# Altium PCB PCB.PcbDoc
Units mil, origin at the board's own origin, x right, y up, seen from the top; angles counter-clockwise.
Board outline 3360 x 1950.13 mil, 2 copper layers (Top Layer, Bottom Layer); 70 components, 39 nets, 187 pads, 106 vias.
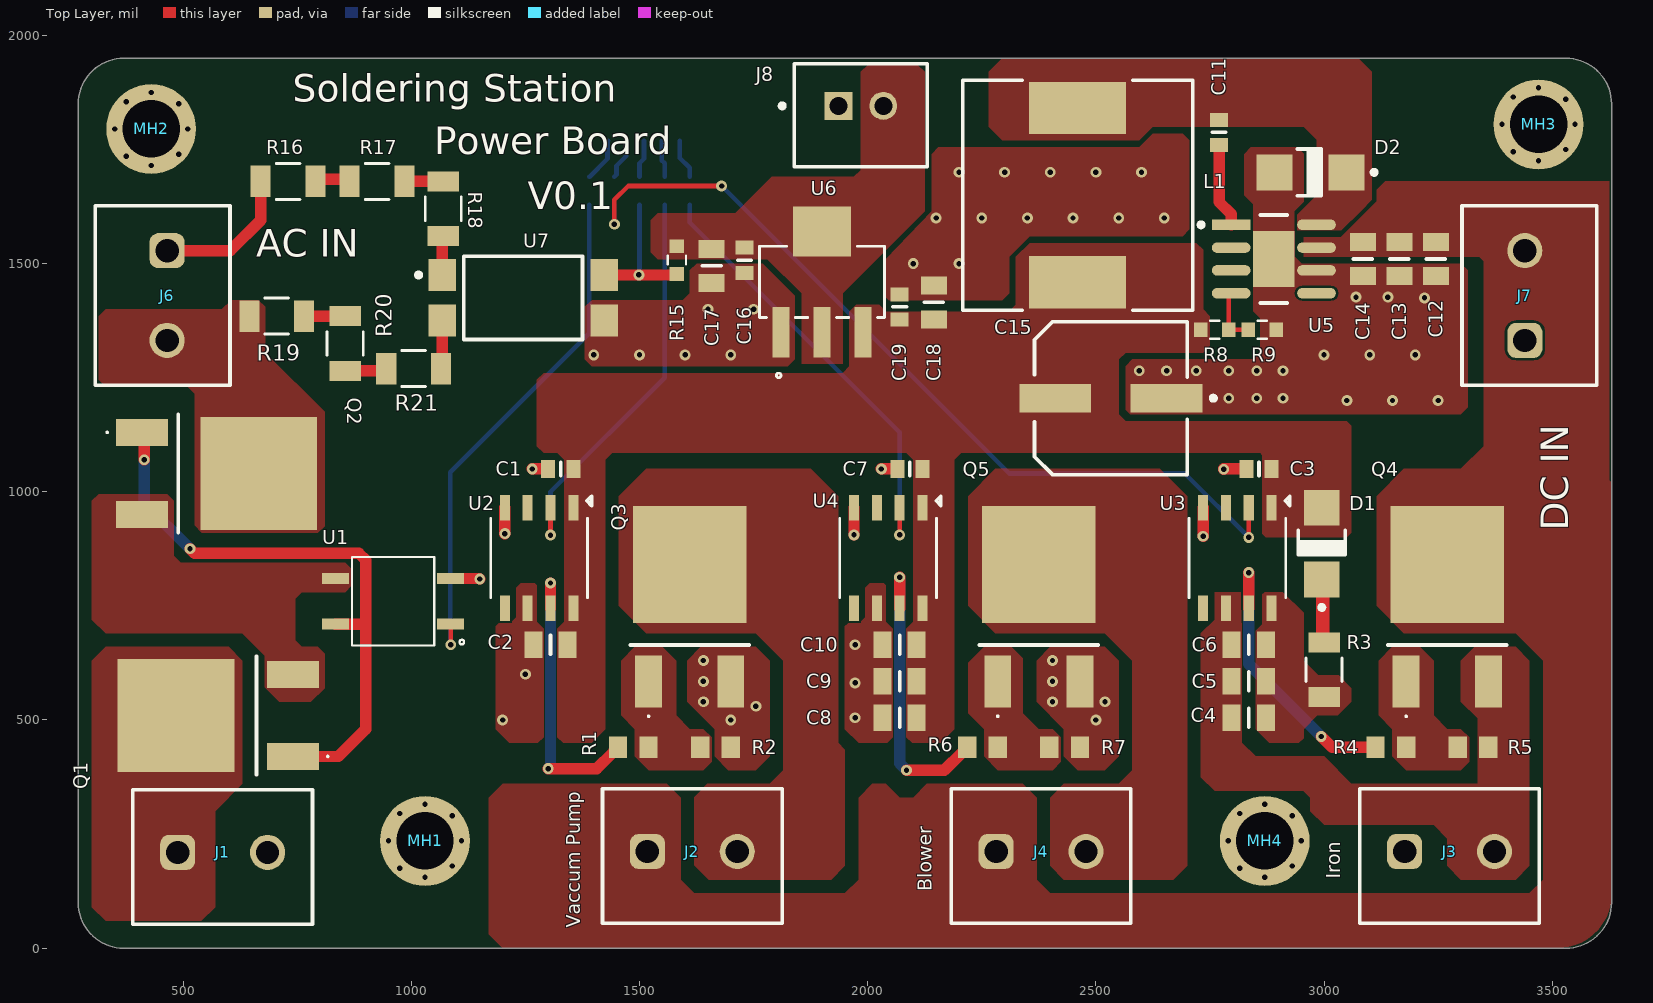
[diagram p0: Top Layer view]
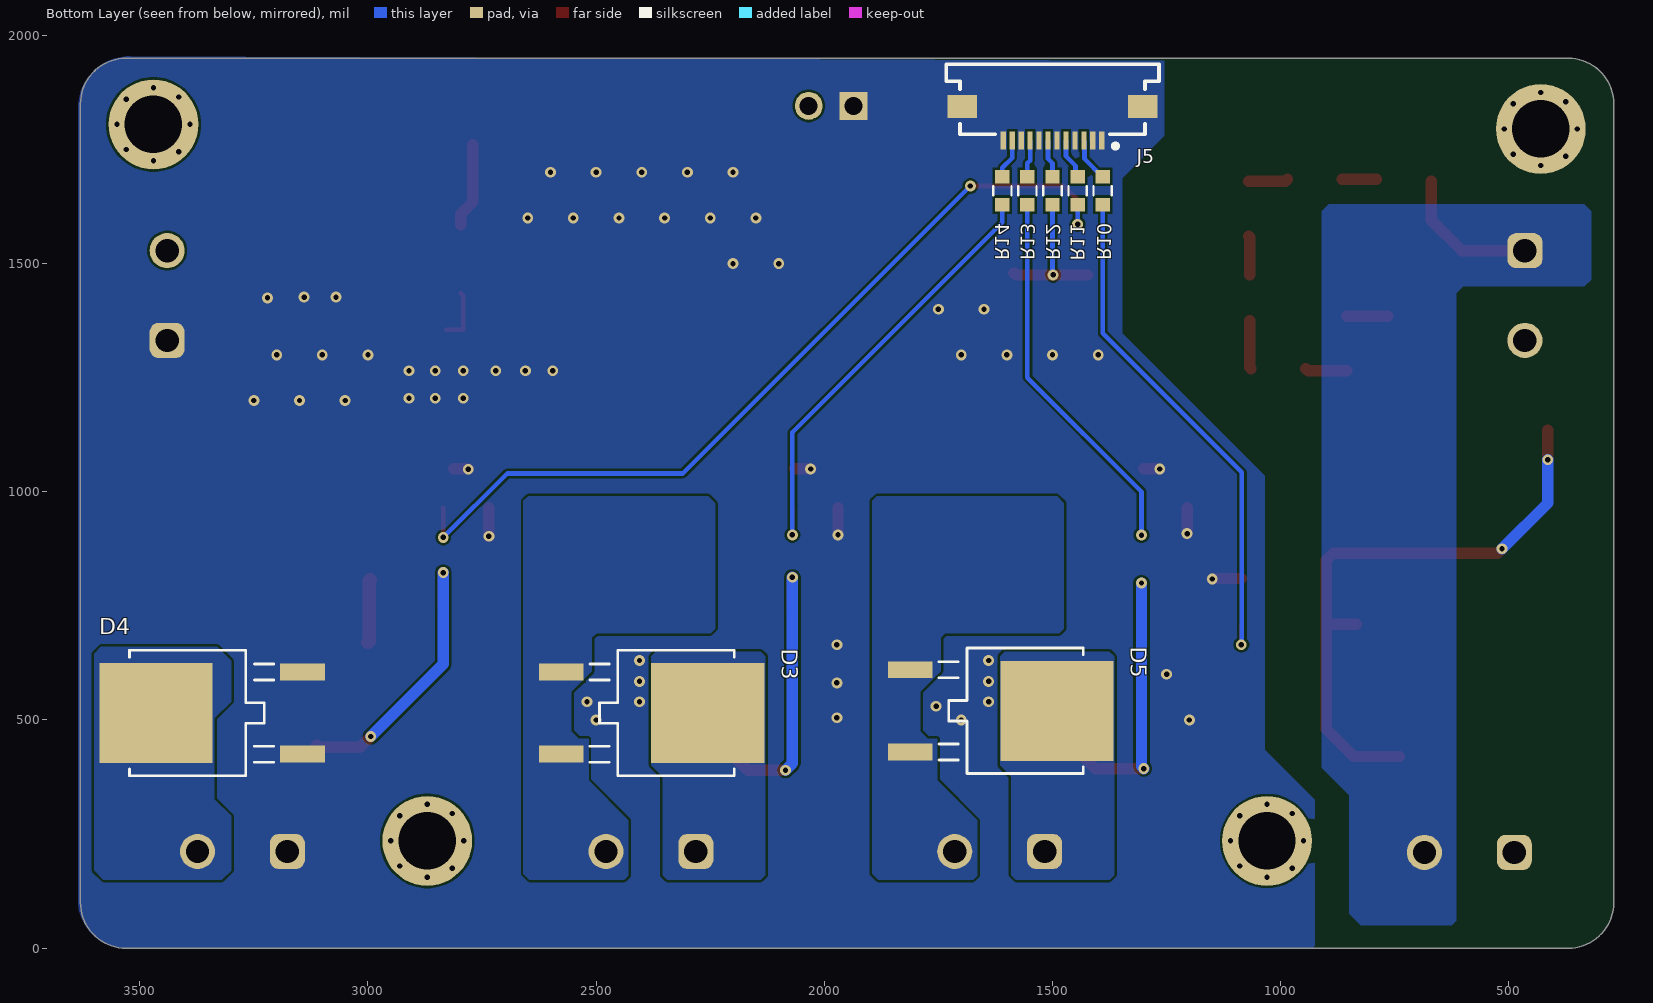
[diagram p1: Bottom Layer view, seen from below]
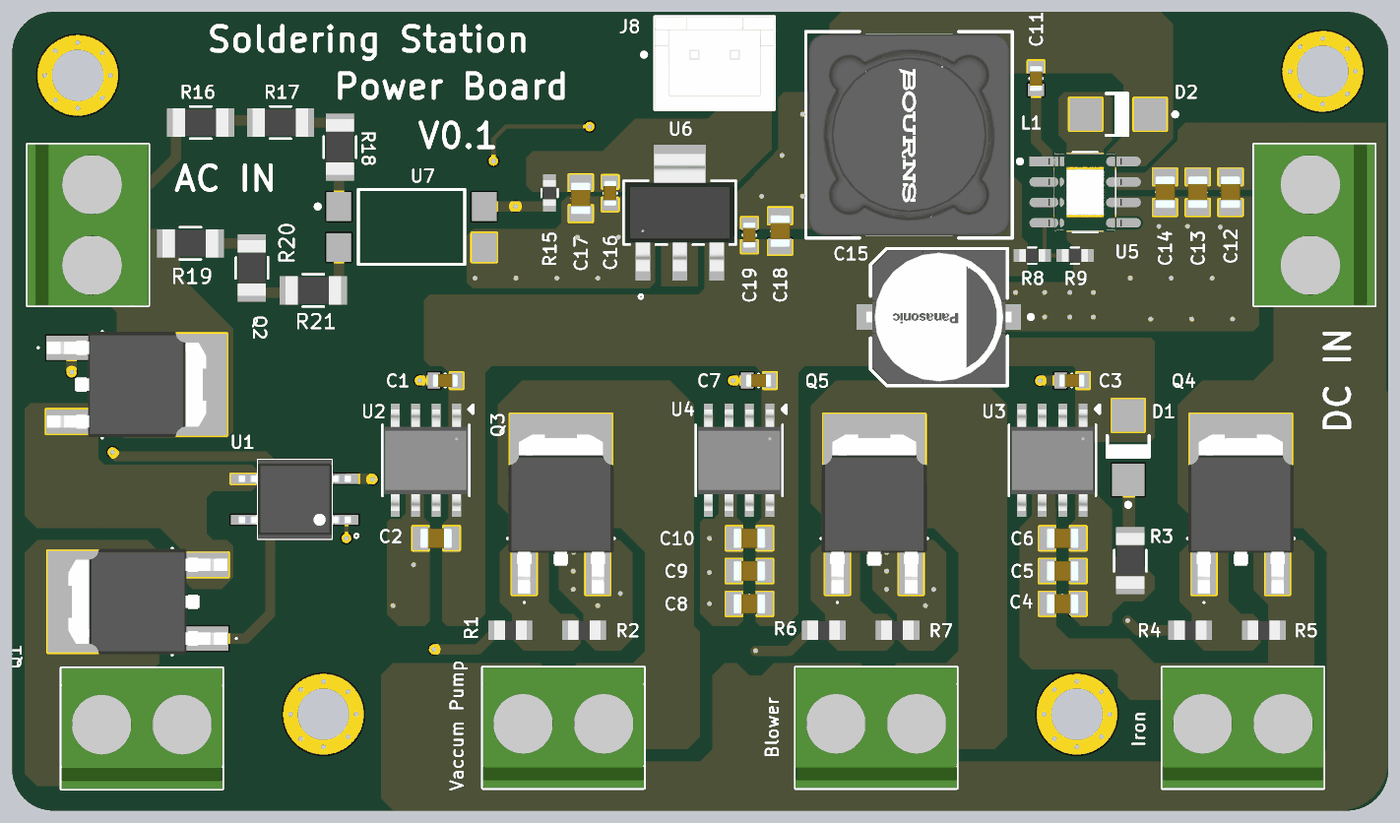
[diagram p2: 3D render of the assembled board from above, using the file's embedded part models]
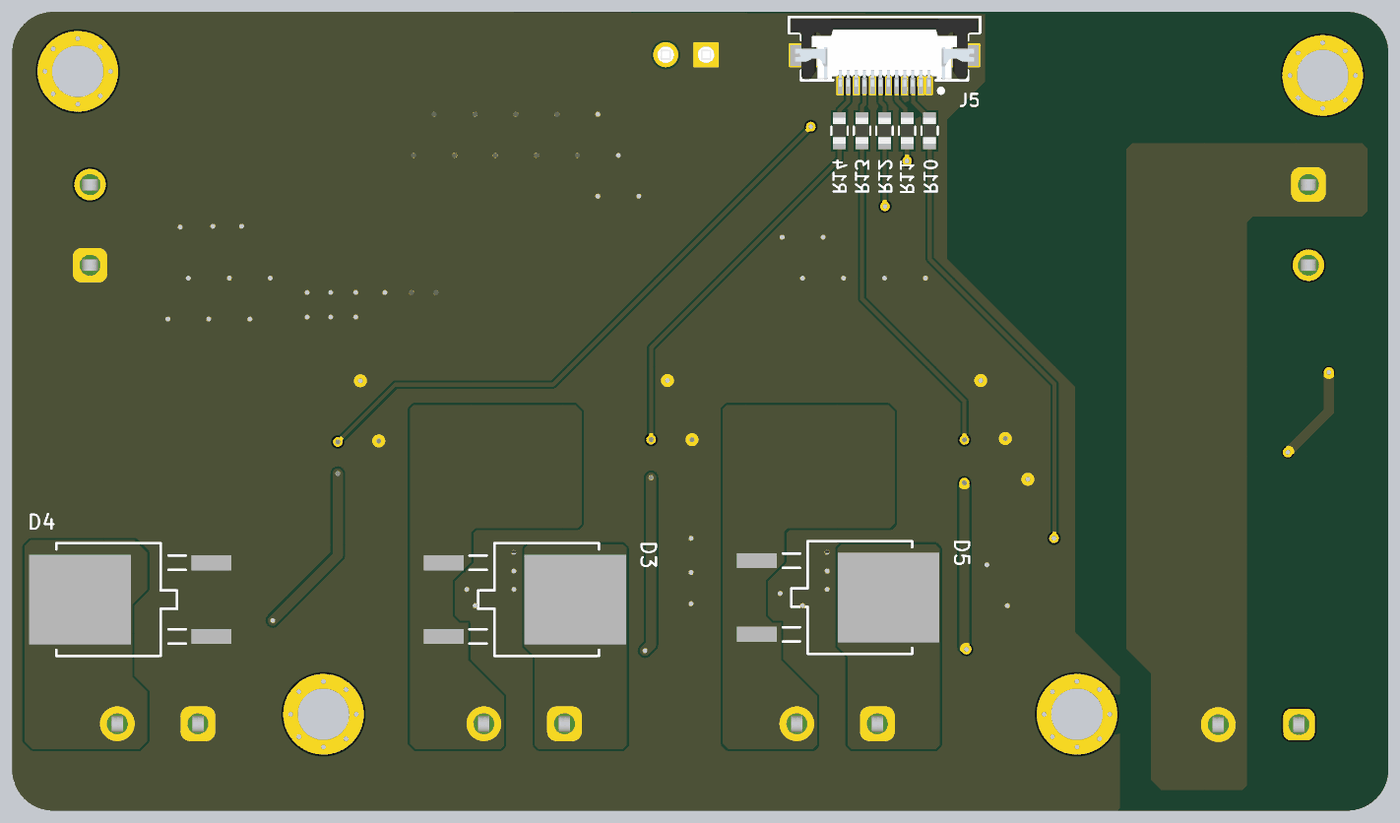
[diagram p3: 3D render of the assembled board from below, using the file's embedded part models]

## Layer stack, top to bottom
Top Solder: solder mask 0.4, Solder Resist, Dk 3.5
Top Layer: signal copper 1.4
Dielectric 1: dielectric 12.6, FR-4, Dk 4.8
Bottom Layer: signal copper 1.4
Bottom Solder: solder mask 0.4, Solder Resist, Dk 3.5

## Board outline
270,99.87 270,1850 cw(c370,1850) 370,1950 3530,1950 cw(c3530,1850) 3630,1850 3630,99.87 cw(c3530,99.87) 3530,-0.13 370,-0.13 cw(c370,99.87)

## Design rules (kind name [scope] priority, off if disabled: settings)
Clearance [All] p1: gap=5 ignorepadtopadclearanceinfootprint=FALSE
PolygonConnect [All] p1: connectstyle=Direct reliefconductorwidth=10 reliefentries=4 polygonreliefangle="90 Angle" airgapwidth=10
RoutingVias [All] p1: holewidth=28 width=50 viastyle="Through Hole" minholewidth=28 minwidth=50 maxholewidth=28 maxwidth=50
SilkToSolderMaskClearance [IsPad] p1: minsilkscreentomaskgap=1 clearancetoexposedcopper=TRUE
SolderMaskExpansion [All] p1: expansion=4 istentingtop=FALSE
SupplyNets "Schematic Supply Nets_1" [InNet('5V0')] p1: voltage=0.000
SupplyNets "Schematic Supply Nets_5" [InNet('15V0')] p2: voltage=0.000
SupplyNets "Schematic Supply Nets_4" [InNet('24V0')] p3: voltage=0.000
SupplyNets "Schematic Supply Nets_3" [InNet('N')] p4: voltage=0.000
SupplyNets "Schematic Supply Nets_2" [InNet('L')] p5: voltage=0.000
SupplyNets "Schematic Supply Nets" [InNet('GND')] p6: voltage=0.000
Width [All] p1: maxlimit=200 minlimit=10 preferedwidth=10
29 further rules are at their usual default settings.

## Classes and differential pairs
component class Designator: C3 C4 C5 C6 D1 D4 J3 Q4 R3 R4 R5 U3
component class Designator: C7 C8 C9 C10 D3 J1 J4 Q1 Q2 Q5 R6 R7 U1 U4
component class Block_Diagramme: J5 J6 J7 J8 MH1 MH2 MH3 MH4 R10 R11 R12 R13 R14 R15 R16 R17 R18 R19 R20 R21 U7

## Components (designator, comment, footprint, x,y, rotation, side; value= is the part's Value field where it differs from the comment)
C1 "CAP-MLCC_SMD-0603_MR-GCM_u_0.1uF_50V_10%_X8L" "Generic Ceramic 0603 CAP" 1322.44,1055 r0 top value=100nF
C2 "CAP-MLCC_SMD-0805_TDK-CGA_u_4.7uF_V_10%_X8R" "Generic Ceramic 0805 CAP" 1305,659.78 r0 top value=4.7µF
C3 "CAP-MLCC_SMD-0603_MR-GCM_u_0.1uF_50V_10%_X8L" "Generic Ceramic 0603 CAP" 2852.44,1055 r0 top value=100nF
C4 "CAP-MLCC_SMD-0805_TDK-CGA_u_4.7uF_V_10%_X8R" "Generic Ceramic 0805 CAP" 2835,499.78 r0 top value=4.7µF
C5 "CAP-MLCC_SMD-0805_TDK-CGA_u_4.7uF_V_10%_X8R" "Generic Ceramic 0805 CAP" 2835,579.78 r0 top value=4.7µF
C6 "CAP-MLCC_SMD-0805_TDK-CGA_u_4.7uF_V_10%_X8R" "Generic Ceramic 0805 CAP" 2835,659.78 r0 top value=4.7µF
C7 "CAP-MLCC_SMD-0603_MR-GCM_u_0.1uF_50V_10%_X8L" "Generic Ceramic 0603 CAP" 2087.44,1055 r0 top value=100nF
C8 "CAP-MLCC_SMD-0805_TDK-CGA_u_4.7uF_V_10%_X8R" "Generic Ceramic 0805 CAP" 2070,499.78 r0 top value=4.7µF
C9 "CAP-MLCC_SMD-0805_TDK-CGA_u_4.7uF_V_10%_X8R" "Generic Ceramic 0805 CAP" 2070,579.78 r0 top value=4.7µF
C10 "CAP-MLCC_SMD-0805_TDK-CGA_u_4.7uF_V_10%_X8R" "Generic Ceramic 0805 CAP" 2070,659.78 r0 top value=4.7µF
C11 "CAP-MLCC_SMD-0603_MR-GCM_n_10nF_50V_10%_COG" "Generic Ceramic 0603 CAP" 2775,1792.56 r270 top value=10nF
C12 "CAP-MLCC_SMD-0805_TDK-CGA_u_4.7uF_V_10%_X8R" "Generic Ceramic 0805 CAP" 3250,1510 r90 top value=4.7µF
C13 "CAP-MLCC_SMD-0805_TDK-CGA_u_4.7uF_V_10%_X8R" "Generic Ceramic 0805 CAP" 3170,1510 r90 top value=4.7µF
C14 "CAP-MLCC_SMD-0805_TDK-CGA_u_4.7uF_V_10%_X8R" "Generic Ceramic 0805 CAP" 3090,1510 r90 top value=4.7µF
C15 "CAP_ELEC_SMD_PNS__EEE_u_100uF_25V_20%" FP-FKE-MFG 2532.95,1205 r180 top value=100µF
C16 "CAP-MLCC_SMD-0603_MR-GCM_u_0.1uF_50V_10%_X8L" "Generic Ceramic 0603 CAP" 1725,1502.44 r90 top value=100nF
C17 "CAP-MLCC_SMD-0805_TDK-CGA_u_10uF_16V_20%_X7S" "Generic Ceramic 0805 CAP" 1663.19,1495 r90 top value=10µF
C18 "CAP-MLCC_SMD-0805_TDK-CGA_u_10uF_16V_20%_X7S" "Generic Ceramic 0805 CAP" 2140,1415 r270 top value=10µF
C19 "CAP-MLCC_SMD-0603_MR-GCM_u_0.1uF_50V_10%_X8L" "Generic Ceramic 0603 CAP" 2075,1410 r270 top value=100nF
D1 "MBRA340T3G" ONSC-SMA-2-403D-02_F_V 2995,886.26 r90 top
D2 "MBRA340T3G" ONSC-SMA-2-403D-02_F_V 2970,1700 r180 top
D3 "STPS1045B" STPS1045B-Footprint-1 2325,515 r270 bottom
D4 "STPS1045B" STPS1045B-Footprint-1 3395,515 r90 bottom
D5 "STPS1045B" STPS1045B-Footprint-1 1560,520 r270 bottom
J1 "691137710002" 691137710002 586.57,199.84 r0 top
J2 "691137710002" 691137710002 1615.81,201.89 r0 top
J3 "691137710002" 691137710002 3275,201.89 r0 top
J4 "691137710002" 691137710002 2380,201.89 r0 top
J5 "687112183622" 687112183622 1500,1860 r0 bottom
J6 "691137710002" 691137710002 455,1430 r270 top
J7 "691137710002" 691137710002 3449.84,1430 r90 top
J8 "B2B-XH-A(LF)(SN)" FP-B2B-XH-A_LF_SN-MFG 1985,1825 r0 top
L1 "SRR1260-150M" FP-SRR1260-MFG 2460,1650 r270 top
MH1 "3mm_Mounting_Hole" Single_3mm_Mounting_Hole 1030,235 r0 top
MH2 "3mm_Mounting_Hole" Single_3mm_Mounting_Hole 430,1795 r0 top
MH3 "3mm_Mounting_Hole" Single_3mm_Mounting_Hole 3470,1805 r0 top
MH4 "3mm_Mounting_Hole" Single_3mm_Mounting_Hole 2870,235 r0 top
Q1 "STD7NM50N" STD7NM50N-Footprint-1 520,515 r90 top value=780mΩ
Q2 "STD7NM50N" STD7NM50N-Footprint-1 630.47,1035 r270 top value=780mΩ
Q3 "STD7NM50N" STD7NM50N-Footprint-1 1615,805 r0 top value=780mΩ
Q4 "STD7NM50N" STD7NM50N-Footprint-1 3275,805 r0 top value=780mΩ
Q5 "STD7NM50N" STD7NM50N-Footprint-1 2380,805 r0 top value=780mΩ
R1 "RES-TK_SMD-0805_VIS-CRCW_R_5.1R_1/10W_1%" Generic_0805_RES 1486.5,440 r0 top value=5.1
R2 "RES-TK_SMD-0805_VIS-CRCW_K_100K_1/8W_1%" Generic_0805_RES 1666.5,440 r180 top value=100k
R3 "RES-TK_SMD-1206_VIS-CRCW_R_1.6R_3/4W_1%" Generic_1206_RES 3005,610 r270 top value=1.6
R4 "RES-TK_SMD-0805_VIS-CRCW_R_5.1R_1/10W_1%" Generic_0805_RES 3146.5,440 r0 top value=5.1
R5 "RES-TK_SMD-0805_VIS-CRCW_K_100K_1/8W_1%" Generic_0805_RES 3326.5,440 r180 top value=100k
R6 "RES-TK_SMD-0805_VIS-CRCW_R_5.1R_1/10W_1%" Generic_0805_RES 2251.5,440 r0 top value=5.1
R7 "RES-TK_SMD-0805_VIS-CRCW_K_100K_1/8W_1%" Generic_0805_RES 2431.5,440 r180 top value=100k
R8 "RES-TK_SMD-0603_VIS-CRCW_K_10K_1/10W_1%" Generic_0603_RES 2760.62,1355 r180 top value=10k
R9 "RES-TK_SMD-0603_VIS-CRCW_R_825R_1/10W_1%" Generic_0603_RES 2865,1355 r180 top value=825
R10 "RES-TK_SMD-0603_VIS-CRCW_K_10K_1/10W_1%" Generic_0603_RES 1390,1660 r90 bottom value=10k
R11 "RES-TK_SMD-0603_VIS-CRCW_K_10K_1/10W_1%" Generic_0603_RES 1445,1660 r90 bottom value=10k
R12 "RES-TK_SMD-0603_VIS-CRCW_K_10K_1/10W_1%" Generic_0603_RES 1500,1660 r90 bottom value=10k
R13 "RES-TK_SMD-0603_VIS-CRCW_K_10K_1/10W_1%" Generic_0603_RES 1555,1660 r90 bottom value=10k
R14 "RES-TK_SMD-0603_VIS-CRCW_K_10K_1/10W_1%" Generic_0603_RES 1610,1660 r90 bottom value=10k
R15 "RES-TK_SMD-0603_VIS-CRCW_K_47K_1/10W_1%" Generic_0603_RES 1581.94,1507.81 r90 top value=47k
R16 "RES-TK_SMD-1206_VIS-CRCW_K_330K_1/4W_1%" Generic_1206_RES 730,1685 r0 top value=330k
R17 "RES-TK_SMD-1206_VIS-CRCW_K_330K_1/4W_1%" Generic_1206_RES 925,1685 r0 top value=330k
R18 "RES-TK_SMD-1206_VIS-CRCW_K_330K_1/4W_1%" Generic_1206_RES 1075,1620 r270 top value=330k
R19 "RES-TK_SMD-1206_VIS-CRCW_K_330K_1/4W_1%" Generic_1206_RES 705,1390 r0 top value=330k
R20 "RES-TK_SMD-1206_VIS-CRCW_K_330K_1/4W_1%" Generic_1206_RES 860,1325 r270 top value=330k
R21 "RES-TK_SMD-1206_VIS-CRCW_K_330K_1/4W_1%" Generic_1206_RES 1005,1275 r0 top value=330k
U1 "VOM1271T" VOM1271T-Footprint-1 960,760 r180 top
U2 "fan73711" fan73711-Footprint-1 1290,845 r270 top
U3 "fan73711" fan73711-Footprint-1 2820,845 r270 top
U4 "fan73711" fan73711-Footprint-1 2055,845 r270 top
U5 "TPS5430QDDARQ1" FP-DDA0008J-IPC_B 2890,1510 r0 top
U6 "AMS1117-5.0" AMS1117-3.3-Footprint-1 1900,1450 r0 top
U7 "H11A817ASD" FAIR-H11A817ASD-4_V 1245,1425 r90 top

## Footprints (in the part's own frame and the unit in brackets; to place one, negate y for a bottom-side part, rotate by r counter-clockwise, add the part's x,y. Pads: shape width x height; smd on the part's side, far side on the other; paste and mask are expansions set on the pad)
687112183622 [mm] "ZIF Connectors, Horizontal, Top Contact Low Profile, pitch 0.5mm, 12p"
  rect 0.3x1 smd: 1(-2.75,2.3) 2(-2.25,2.3) 3(-1.75,2.3) 4(-1.25,2.3) 5(-0.75,2.3) 6(-0.25,2.3) 7(0.25,2.3) 8(0.75,2.3) 9(1.25,2.3) 10(1.75,2.3) 11(2.25,2.3) 12(2.75,2.3)
  rect 1.65x1.3 smd: M1(-5.025,0.4) M2(5.025,0.4)
  silkscreen extent -5.92,-1.95 5.93,2.72, body extent -5.85,-1.9 5.85,2.35, height 1.28
691137710002 [mm] "Horizontal Cable Entry with Pressure Clamp, pitch 5mm, 02p"
  rrect50% 1.95x1.95 hole 1.3: 1(-2.5,0.25)
  round 1.95 hole 1.3: 2(2.5,0.25)
  silkscreen extent -5,-3.75 5,3.75, body extent -5,-3.75 5,3.75, height 11.6
AMS1117-3.3-Footprint-1 [mil]
  rect 37x110 smd paste+0 mask+0: 1(-90.16,-100.5) 2(0,-100.5) 3(90.16,-100.5)
  rect 128x110 smd paste+0 mask+0: 4(0,120.5)
  silkscreen extent -137,-200 137,88, body extent -132,-134 132,154, height 71
FAIR-H11A817ASD-4_V [mm] "SMD, 4-Leads, Body 6.605x4.64mm, Pitch 2.54mm"
  rect 1.78x1.525 smd: 1(1.27,4.507) 2(-1.27,4.507) 3(-1.27,-4.507) 4(1.27,-4.507)
  silkscreen extent -2.32,-3.3 2.32,5.94, body extent -2.32,-3.3 2.32,3.3, height 5.59
fan73711-Footprint-1 [mil]
  rect 56x22 smd paste+0 mask+0: 1(-120,65) 2(-120,15) 3(-120,-35) 4(-120,-85) 5(100,-85) 6(100,-35) 7(100,15) 8(100,65)
  silkscreen extent -145,-116 77,105, body extent -134,-111 114,91, height 71
FP-B2B-XH-A_LF_SN-MFG [mm]
  rect 1.55x1.55 hole 1 paste-2539.97 mask+0: 1(-1.25,0.525)
  round 1.55 hole 1 paste-2539.97 mask+0: 2(1.25,0.525)
  silkscreen extent -4.5,-2.88 3.7,2.88, body extent -3.8,-2.98 3.8,2.98, height 0.25
FP-DDA0008J-IPC_B [mm]
  rect 2.153x0.582 smd paste+0 mask+0: 1(-2.377,1.905)
  rrect100% 2.153x0.582 smd paste+0 mask+0: 2(-2.377,0.635) 3(-2.377,-0.635) 4(-2.377,-1.905) 5(2.377,-1.905) 6(2.377,-0.635) 7(2.377,0.635) 8(2.377,1.905)
  rect 2.3x3.1 smd paste-1000 mask+0: 9(0,0)
  silkscreen extent -4.17,-2.45 0.75,2.45, body extent -3.7,-2.7 3.7,2.7, height 0.25
FP-FKE-MFG [mm]
  rect 4x1.6 smd paste+0 mask+0: 1(3.1,0) 2(-3.1,0)
  silkscreen extent -5.82,-4.25 4.25,4.25, body extent -5.35,-4.5 5.35,4.5, height 0.25
FP-SRR1260-MFG [mm]
  rect 2.9x5.4 smd paste+0 mask+0: 1(-4.85,0) 2(4.85,0)
  silkscreen extent -6.4,-6.4 6.4,6.4, body extent -6.5,-6.5 6.5,6.5, height 0.25
"Generic Ceramic 0603 CAP" [mm]
  rect 0.78x0.99 smd: 1(-0.573,-0.127) 2(0.827,-0.127)
  silkscreen extent 0.13,-0.51 0.13,0.25, body extent -0.67,-0.53 0.93,0.28, height 0.9
"Generic Ceramic 0805 CAP" [mm]
  rect 1x1.45 smd: 1(-0.95,0.127) 2(0.95,0.127)
  silkscreen extent 0,-0.4 0,0.65, body extent -1,-0.5 1,0.75, height 0.94
Generic_0603_RES [mm]
  rect 0.756x0.8 smd paste+0 mask+0: 1(-0.778,0) 2(0.778,0)
  silkscreen extent -0.25,-0.51 0.26,0.51, body extent -0.8,-0.4 0.8,0.4, height 0.71
Generic_0805_RES [mil]
  rect 40x47 smd paste+0 mask+0: 1(-33.5,0) 2(33.5,0)
  body extent -39,-24 39,24, height 28
Generic_1206_RES [mil]
  rect 44x69 smd paste+0 mask+0: 1(-60,-5) 2(60,-5)
  silkscreen extent -26,-45 26,35, body extent -68,-39 68,29, height 30
ONSC-SMA-2-403D-02_F_V [mm] "Molded, 2-Leads, Body 4.32x2.6mm"
  rect 2x2 smd: 1(-2,0) 2(2,0)
  silkscreen extent -3.67,-1.3 0.74,1.3, body extent -2.16,-1.3 2.16,1.3, height 2.2
Single_3mm_Mounting_Hole [mm]
  round 5 / inner round 1.524 / far side round 5 hole 3.2: 1(0,0)
  body extent -2.74,-2.75 2.75,2.75, height 3.98
STD7NM50N-Footprint-1 [mm]
  rect 1.5x2.9 smd: 1(-2.413,-5.6) 3(2.159,-5.6)
  rect 6.3x6.5 smd: 2(-0.127,0.9)
  silkscreen extent -3.43,-7.59 3.17,-3.57, body extent -3.4,-7.01 3.14,2.87, height 2.63
STPS1045B-Footprint-1 [mil]
  rect 37x98 smd paste+0 mask+0: 1(-90,-251.5) 2(90,-251.5)
  rect 219x248 smd paste+0 mask+0: 3(0,69.5)
  silkscreen extent -138,-189 138,128
VOM1271T-Footprint-1 [mm]
  rect 1.5x0.6 smd: 1(-3.205,1.27) 2(-3.205,-1.27) 3(3.205,-1.27) 4(3.205,1.27)
  silkscreen extent -3.95,-2.46 2.28,2.46, body extent -3.47,-2.46 3.47,2.46, height 2.32

## Part data
C1 C3 C7 C16 C19: library part CMP-001-00115-11, "Ceramic Capacitor, Multilayer, Ceramic, 50V, 10% +Tol, 10% -Tol, X8L, -40/+15% TC, 0.1uF, Surface Mount, 0603", Capacitor Type=Ceramic, Case/Package=0603, Max Operating Temperature=150°C, Min Operating Temperature=-55°C, Voltage Rating=50V, Automotive=AEQ-200, Mounting Technology="Surface Mount", Pins=2, RoHS Compliant=Yes
C2 C4 C5 C6 C8 C9 C10 C12 C13 C14: library part CMP-001-00158-2, "Ceramic Capacitor, Multilayer, Ceramic, 50V, 10% +Tol, 10% -Tol, X5R, 15% TC, 4.7uF, Surface Mount, 0805", Capacitor Type=Ceramic, Case/Package=0805, Dielectric=x5r, Max Operating Temperature=85°C, Min Operating Temperature=-55°C, Tolerance=10%, Voltage Rating=50V, Automotive=AEQ-Q200, Mounting Technology="Surface Mount", Pins=2, RoHS Compliant=Yes
C11: library part CMP-001-00163-2, "Ceramic Capacitor, Multilayer, Ceramic, 50V, 5% +Tol, 5% -Tol, C0G, 30ppm/Cel TC, 0.01uF, Surface Mount, 0603", Capacitor Type=Ceramic, Case/Package=0603, Dielectric=COG, Max Operating Temperature=125°C, Min Operating Temperature=-55°C, Voltage Rating=50V, Automotive=AEQ-200, Mounting Technology="Surface Mount", Pins=2, RoHS Compliant=Yes
C15: library part CMP-001-00185-2, "Aluminum Electrolytic Capacitor, Polarized, Aluminum (wet), 25V, 20% +Tol, 20% -Tol, 100uF, Surface Mount, 3333", Capacitor Type=Aluminium, Case/Package=3333, Manufacturer Part Number=EEE-FK1H101GP, Max Operating Temperature=105°C, Min Operating Temperature=-55°C, Ripple Current=225mA, Voltage Rating=25V, Mounting Technology="Surface Mount", Pins=2, RoHS Compliant=Yes
C17 C18: library part CMP-001-00173-2, "Ceramic Capacitor, Multilayer, Ceramic, 16V, 20% +Tol, 20% -Tol, X7S, 22% TC, 10uF, Surface Mount, 0805", Capacitor Type=Ceramic, Case/Package=0805, Dielectric=X7S, Tolerance=20%, Voltage Rating=16V, Automotive=AEQ-Q200, Mounting Technology=SMD, Pins=2, RoHS Compliant=Yes
D1 D2: library part CMP-001-0146-1, "Diode, Schottky Barrier, Vr 40V, If 3A, Pkg SMA, Vf 0.45V, Tj +150degc, Cs 100A, Ir 15mA", Average Rectified Current=3A, Case/Package=SMA, Forward Voltage=450mV, Manufacturer Lifecycle Status=ACTIVE, Max Forward Surge Current (Ifsm)=100A, Max Junction Temperature (Tj)=150°C, Max Repetitive Reverse Voltage (Vrrm)=40V, Min Operating Temperature=-55°C, Peak Reverse Current=300µA, China RoHS=Non-Compliant, Current Rating=3A, Element Configuration=Single, Forward Current=3A, Halogen Free="Halogen Free", Height=2.2mm, Lead Free="Lead Free", Length=4.32mm, Lifecycle Status=Production, Max Operating Temperature=150°C, Max Output current=3A, Max Reverse Voltage (DC)=40V, Number of Elements=1, Number of Terminals=2, Output Current=3A, Packaging="Tape and Reel", Peak Non-Repetitive Surge Current=100A, Pins=2, Polarity=Standard, Radiation Hardening=No, REACH SVHC=No, Reverse Standoff Voltage=40V, Reverse Voltage=40V, RoHS=Compliant, Schedule B=8541100080, Voltage Rating (DC)=40V, Width=2.6mm
D3 D4 D5: library part CMP-001-0199-1, "Rectifier Diode, Schottky, 1 Phase, 1 Element, 10A, 45V V(RRM), Silicon, TO-252AA", Average Rectified Current=10A, Case/Package=DPAK, Forward Voltage=570mV, Max Forward Surge Current (Ifsm)=75A, Max Junction Temperature (Tj)=175°C, Max Repetitive Reverse Voltage (Vrrm)=45V, Max Reverse Leakage Current=100µA, Min Operating Temperature=-65°C, China RoHS=Non-Compliant, Current Rating=10A, Element Configuration="Common Anode", Forward Current=10A, Height=2.4mm, Lead Free="Lead Free", Length=6.6mm, Lifecycle Status=Production, Max Operating Temperature=175°C, Max Output current=10A, Max Reverse Voltage (DC)=45V, Max Surge Current=75A, Mounting Technology="Surface Mount", Number of Elements=1, Number of Terminals=2, Output Current=10A, Peak Non-Repetitive Surge Current=75A, Peak Reverse Current=100µA, Pins=2, Polarity=Standard, Radiation Hardening=No, REACH SVHC=No, Reverse Standoff Voltage=45V, RoHS=Compliant, Schedule B="8541100080, 8541100080", Voltage Rating (DC)=45V, Width=6.2mm
J1 J2 J3 J4 J6 J7: library part CMP-001-0029-2, "2P Block Terminal", RoHS Compliant=Yes
J5: library part CMP-1502-01592-2, Contact Resistance=30mΩ, Current Rating=400mA, Insulation Resistance=100MΩ, Max Operating Temperature=85°C, Min Operating Temperature=-25°C, Operating Supply Voltage=50V, Gender=Receptacle, Lead Pitch=500µm, Length=6.6mm, NexarPartId=81848331, Number of Pins=12, Orientation=Horizontal, Packaging="Tape and Reel", Pitch=500µm, RoHS=Compliant
J8: library part CMP-001-0161-1, "CONNECTOR HEADER, XH SERIES, 2 POSITION, 2.50MM, Press-Fit Solder, Detent Lock, Natural", Color=Natural, Contact Resistance=20mΩ, Current Rating=3A, Housing Color=White, Insulation Resistance=1GΩ, Max Operating Temperature=85°C, Max Voltage Rating (AC)=250V, Min Operating Temperature=-25°C, China RoHS=Compliant, Connector Type="Male Pin", Contact Gender=Male, Contact Material="Copper, Tin", Contact Plating=Tin, Depth=5.75mm, Fastening Type=Detent, Height=7mm, Housing Material=Polyamide, Lead Free="Lead Free", Lead Pitch=2.5mm, Length=7.4mm, Lifecycle Status=Production, Max Current Rating=3A, Max Voltage Rating (DC)=250V, Mounting Technology="Through Hole", Number of Contacts=2, Number of Positions=2, Number of Rows=1, Orientation=Straight, Pins=2, Pitch=2.5mm, REACH SVHC=Yes, RoHS=Compliant, Terminal Pitch=2.5mm, Termination=Solder, Voltage Rating=250V, Voltage Rating (AC)=250V, Weight=28.349523g, Width=6.35mm, Wire/Cable Gauge=22AWG
L1: library part CMP-2000-07146-2, "FIXED IND 15UH 5A 27 MOHM SMD", Case/Package=1260, Current Rating=5A, DC Resistance (DCR)=27mR, Frequency=17.6MHz, Inductance=15uH, Inductance Tolerance=20%, Max Operating Temperature=125°C, Min Operating Temperature=-40°C, Package Quantity=600, Resistance=27MR, Resistor Type=Wirewound, Saturation Current=4.6A, Test Frequency=100kHz, Core Material=Ferrite, DC Current=5A, Depth=12.8mm, Height=6mm, Height - Seated (Max)=0.256inch, Length=12.5mm, Material=Steel, Max DC Current=5A, Military Standard=Not, Mount="Surface Mount", Number of Pins=2, Packaging="Tape and Reel", Q Factor=25, REACH SVHC="No SVHC", RMS Current (Irms)=5A, RoHS Compliant=Yes, Sample Rate (Hz)=100kHz, Self Resonant Frequency=17.6MHz, Series=SRR1260, Shielding=Shielded, Termination=SMD/SMT, Tolerance=20%, Width=12.5mm
MH1 MH2 MH3 MH4: library part CMP-001-0046-3, "3.2mm, sPad Mounting Hole", Size=3mm
Q1 Q2 Q3 Q4 Q5: library part CMP-001-0178-1, "N-channel 500V - 0.70 Ohm - 5A - TO-220 - TO-220FP - Ipak - Dpak", Case/Package=TO-252-3, Continuous Drain Current (ID)=5A, Drain to Source Breakdown Voltage=500V, Drain to Source Resistance=780mΩ, Gate to Source Voltage (Vgs)=25V, Input Capacitance=400pF, Max Operating Temperature=150°C, Max Power Dissipation=45W, Min Operating Temperature=-55°C, China RoHS=Non-Compliant, Drain to Source Voltage (Vdss)=500V, Element Configuration=Single, Fall Time=9ns, Lead Free="Lead Free", Lifecycle Status=Obsolete, Min Breakdown Voltage=500V, Mounting Technology="Surface Mount", Nominal Vgs=3V, Number of Elements=1, Number of Terminals=2, Packaging="Cut Tape (CT)", Pins=3, Power Dissipation=45W, Rds On Max=780mΩ, REACH SVHC=No, Rise Time=5ns, RoHS=Compliant, Turn-Off Delay Time=40ns
R1 R4 R6: library part CMP-009-00244-4, "Fixed Resistor, Metal Glaze/thick Film, 0.125W, 1ohm, 150V, 1% +/-Tol, 100ppm/Cel, Surface Mount, 0805", Case/Package=0805, Max Operating Temperature=155°C, Min Operating Temperature=-55°C, Power=125mW, Tolerance=1%, Voltage Rating=75V, Mounting Technology="Surface Mount", Pins=2, RoHS Compliant=Yes
R2 R5 R7: library part CMP-009-00208-8, "Fixed Resistor, Metal Glaze/thick Film, 0.125W, 100000ohm, 150V, 1% +/-Tol, 100ppm/Cel, Surface Mount, 0805", Case/Package=0805, Max Operating Temperature=155°C, Min Operating Temperature=-55°C, Power=125mW, Tolerance=1%, Voltage Rating=150V, Mounting Technology="Surface Mount", Pins=2, RoHS Compliant=Yes
R3: library part CMP-009-00251-1, "Fixed Resistor, Metal Glaze/thick Film, 0.75W, 1.6ohm, 200V, 1% +/-Tol, 100ppm/Cel, Surface Mount, 1206", Case/Package=1206, Max Operating Temperature=155°C, Min Operating Temperature=-55°C, Power=750mW, Tolerance=1%, Mounting Technology="Surface Mount", Pins=2, RoHS Compliant=Yes
R8: library part CMP-009-00231-2, "Fixed Resistor, Metal Glaze/thick Film, 0.1W, 10000ohm, 75V, 1% +/-Tol, 100ppm/Cel, Surface Mount, 0603", Case/Package=0603, Max Operating Temperature=155°C, Min Operating Temperature=-55°C, Power=100mW, Tolerance=1%, Voltage Rating=75V, Mounting Technology="Surface Mount", Pins=2, RoHS Compliant=Yes
R9: library part CMP-009-00203-6, "Fixed Resistor, Metal Glaze/thick Film, 0.1W, 825ohm, 75V, 1% +/-Tol, 100ppm/Cel, Surface Mount, 0603", Case/Package=0603, Max Operating Temperature=155°C, Min Operating Temperature=-55°C, Power=100mW, Tolerance=1%, Voltage Rating=75V, Mounting Technology="Surface Mount", Pins=2, RoHS Compliant=Yes
R10 R11 R12 R13 R14: library part CMP-009-00246-1, "Fixed Resistor, Metal Glaze/thick Film, 0.1W, 10000ohm, 75V, 1% +/-Tol, 100ppm/Cel, Surface Mount, 0603", Case/Package=0603, Max Operating Temperature=155°C, Min Operating Temperature=-55°C, Power=100mW, Tolerance=1%, Voltage Rating=75V, Mounting Technology="Surface Mount", Pins=2, RoHS Compliant=Yes
R15: library part CMP-009-00207-2, "Fixed Resistor, Metal Glaze/thick Film, 0.1W, 47000ohm, 75V, 1% +/-Tol, 100ppm/Cel, Surface Mount, 0603", Case/Package=0603, Max Operating Temperature=155°C, Min Operating Temperature=-55°C, Power=100mW, Tolerance=1%, Voltage Rating=75V, Mounting Technology="Surface Mount", Pins=2, RoHS Compliant=Yes
R16 R17 R18 R19 R20 R21: library part CMP-009-00015-1, "Res Thick Film 1206 330K Ohm 1% 1/4W ±100ppm/°C Molded SMD SMD Paper T/R", Case/Package=1206, Max Operating Temperature=155°C, Min Operating Temperature=-55°C, Power=750mW, Tolerance=1%, Voltage Rating=200V, Mounting Technology="Surface Mount", Pins=2, RoHS Compliant=Yes
U1: library part CMP-001-0179-1, "Optocoupler DC-IN 1-CH Linear Photovoltaic DC-OUT 4-Pin SOP T/R", Ambient Temperature Range High=100°C, Case/Package=SOP, Forward Current=50mA, Forward Voltage=1.4V, Isolation Voltage=4.5kV, Max Output current=7µA, Max Supply Voltage=1.6V, Min Operating Temperature=-40°C, Reverse Breakdown Voltage=5V, Contact Plating=Tin, Height=2.42mm, Height - Seated (Max)=2.42mm, Input Current=50mA, Lead Free="Lead Free", Length=4.92mm, Lifecycle Status=Production, Max Input Current=50mA, Max Operating Temperature=100°C, Mounting Technology="Surface Mount", Number of Channels=1, Number of Circuits=1, Number of Elements=1, Number of Terminals=4, Pins=4, Radiation Hardening=No, REACH SVHC=Yes, RoHS=Compliant, Schedule B="8541408000, 8541408000", Terminal Pitch=2.54mm, Turn-Off Delay Time=24µs, Turn-On Delay Time=53µs, Width=4.57mm
U2 U3 U4: library part CMP-001-0175-1, "Tape & Reel (TR) FAN73711 High-Side 2009 gate driver 25ns 125C 4A 4A 625mW", Ambient Temperature Range High=125°C, Case/Package=SOP, Manufacturer Lifecycle Status=ACTIVE, Max Junction Temperature (Tj)=150°C, Max Output current=4A, Max Power Dissipation=625mW, Max Supply Current=100µA, Max Supply Voltage=20V, Min Operating Temperature=-40°C, Min Supply Voltage=10V, Nominal Supply Current=35µA, Operating Supply Voltage=15V, Output Voltage=1.2V, China RoHS=Compliant, Fall Time=15ns, Height=1.85mm, Height - Seated (Max)=1.8mm, Lead Free="Lead Free", Length=4.92mm, Lifecycle Status=Production, Max Operating Temperature=125°C, Mounting Technology="Surface Mount", Number of Channels=1, Number of Circuits=1, Number of Drivers=1, Number Of Outputs=1, Number of Terminals=8, Output Current=4A, Packaging="Cut Tape", Pins=8, Power Dissipation=625mW, Propagation Delay=150ns, Radiation Hardening=No, REACH SVHC=Yes, Rise Time=25ns, RoHS=Compliant, Schedule B="8542310000, 8542310000", Terminal Pitch=1.27mm, Turn-Off Delay Time=150ns, Turn-On Delay Time=150ns, Weight=143mg, Width=3.95mm
U5: library part CMP-001-0169-1, "Automotive 5.5V to 36V, 500kHz Fixed Frequency 3A Buck Converter 8-SO PowerPAD -40 to 125", Manufacturer Lifecycle Status=ACTIVE, Max Junction Temperature (Tj)=125°C, Max Output current=3A, Max Output Voltage=31V, Max Supply Voltage=36V, Min Input Voltage=5.5V, Min Operating Temperature=-40°C, Min Output Voltage=1.22V, Nominal Supply Current=3mA, Output Voltage=1.221V, Switching Frequency=500kHz, Efficiency=95%, Height=1.7mm, Lead Free="Lead Free", Length=4.89mm, Lifecycle Status=Production, Max Duty Cycle=89%, Max Operating Temperature=125°C, Min Supply Voltage=5.5V, Mounting Technology="Surface Mount", Number Of Outputs=1, Operating Supply Voltage=36V, Output Current=3A, Output Type=Adjustable, Pins=8, Quiescent Current=3mA, Radiation Hardening=No, REACH SVHC=No, RoHS=Compliant, Synchronous Rectifier=No, Thickness=1.48mm, Topology=Buck, Weight=70.590313mg, Width=3.9mm
U6: library part CMP-001-0174-1, "LDO Regulator Pos 5V 1A 4-Pin(3+Tab) SOT-223 / 1A LOW DROPOUT VOLTAGE REGULATOR", Case/Package=SOT-223, Dropout Voltage=1.1V, Max Junction Temperature (Tj)=125°C, Max Power Dissipation=1.2W, Max Supply Voltage=15V, Min Operating Temperature=-40°C, Nominal Supply Current=5mA, Output Current=1A, Output Voltage=5V, Height=1.8mm, Max Operating Temperature=125°C, Number Of Outputs=1, Pins=2, REACH SVHC=Yes, RoHS=Compliant
U7: library part CMP-001-0167-1, "OptoCouplers & OptoIsolators Optocoupler SM-DIP4 Phototransistor", Case/Package=SMD/SMT, Collector Emitter Breakdown Voltage=70V, Collector Emitter Saturation Voltage=200mV, Continuous Collector Current=50mA, Current Transfer Ratio=80%, Dark Current=100nA, Forward Voltage=1.5V, Isolation Voltage=5kV, Max Operating Temperature=100°C, Max Power Dissipation=200mW, Min Operating Temperature=-55°C, Reverse Breakdown Voltage=6V, Collector Emitter Voltage (VCEO)=70V, Fall Time=18µs, Forward Current=50mA, Lead Free="Lead Free", Lifecycle Status=Obsolete, Max Collector Current=50mA, Number of Channels=1, Number of Circuits=1, Number of Elements=1, Output Current per Channel=50mA, Output Voltage=70V, Packaging="Tape and Reel", Pins=4, Power Dissipation=200mW, Rise Time=18µs, RoHS=Compliant

## Via types
v1: diameter 23.62, hole 11.81, Top Layer to Bottom Layer, tented both sides, 56 vias
v2: diameter 23.62, hole 11.81, Top Layer to Bottom Layer, 50 vias

## Nets (pads, with @x,y where several pads share a name; then routed paths per layer and width w, separated by ;. In a path a pad name is that pad's centre, name@x,y a point inside that pad or via, vN(x,y) a via of type N, cw(c..) or ccw(c..) an arc to the next point about the centre after c; other vN are vias at no path point)
0_CROSS_ISO: R12.1 R15.1 U7.4 | length 318.9
  Top Layer w25: U7.4 1579.75,1475 1584.13,1479.38 R15.1@1585,1479.38
  Bottom Layer w10: v2(1498.75,1475.3) 1500,1476.55 R12.1
5V0: C16.2 C17.2 J8.2 R15.2 U6.2 U6.4
15V0: C1.2 C2.2 C3.2 C7.2 C8.2 C9.2 C10.2 C15.1 C18.2 C19.2 D1.2 L1.2 R8.2 U2.1 U2.8 U3.1 U4.1 U4.8 U6.3
24V0: C12.2 C13.2 C14.2 D3.3 D5.3 J2.1 J4.1 J7.2 Q4.2 U5.7
BLOWER_ISO: R14.1 U4.2 | length 974
  Top Layer w10: v2(2070,905.48) U4.2
  Bottom Layer w10: R14.1 1610,1590 2070,1130 v2(2070,905.48)
G_B: Q1.1 Q2.1 U1.4 | length 1318.1
  Top Layer w25: Q2.1@414.53,1135 414.53,1070.47 v2(415,1070) ; v2(515,875) 525,865 885.36,865 900,850.36 900,710 ; Q1.1 840,420 900,480 900,710 ; U1.4 900,710
  Bottom Layer w25: v2(415,1070) 414.53,1069.53 414.53,975.47 v2(515,875)
Gate: R4.1 U3.7 | length 633.9
  Top Layer w25: U3.7 v1(2835,822.86) ; v1(2993.78,463.78) 3017.56,440 3105.5,440 3110.5,445 R4.1@3113,445
  Bottom Layer w25: v1(2835,822.86) 2835,622.56 v1(2993.78,463.78)
GND: C1.1 C2.1 C3.1 C7.1 C8.1 C9.1 C10.1 C12.1 C13.1 C14.1 C15.2 C16.1 C17.1 C18.1 C19.1 D2.2 D4.1 D4.2 J3.1 J5.1 J5.2 J5.4 J5.6 J5.8 J5.10 J5.12 J5.M1 J5.M2 J7.1 J8.1 Q3.3 Q5.3 R2.1 R7.1 R9.1 U1.2 U2.4 U2.6 U3.4 U4.4 U4.6 U5.6 U5.9 U6.1 U7.3 | length 345.6
  Top Layer w25: U1.2 1148.78,810 v2(1150,808.78) ; v2(1205,908.34) U2.4 ; v2(1265,1050) C1.1 ; v2(1970,905.48) U4.4 ; v2(2030,1050) C7.1 ; v2(2735,902.39) U3.4 ; v2(2780,1049.42) 2780.58,1050 2812.44,1050
  other v1: 1200,500 1700,500 2500,500 1972.5,504.78 1755,530 1640,540 2405,540 2520,540 1972.5,581.2 1640,584.53 2405,584.53 1250,600 1640,630.27 2405,630.27 1972.5,664.78 3050,1200 3150,1200 3250,1200 2791.24,1205 2852.5,1205 2910,1205 2595,1265 2655,1265 2720,1265 2791.24,1265 2852.5,1265 2910,1265 1400,1300 1500,1300 1600,1300 1700,1300 3000,1300 3100,1300 3200,1300 1650,1400 1750,1400 3220,1424.73 3070,1426.63 3140,1426.63 2100,1500 2200,1500 2150,1600 2250,1600 2350,1600 2450,1600 2550,1600 2650,1600 2200,1700 2300,1700 2400,1700 2500,1700 2600,1700
HEAT_GUN_ISO: R10.1 U1.1 | length 1136.6
  Top Layer w10: v2(1086.18,664.78) U1.1
  Bottom Layer w10: v2(1086.18,664.78) 1085,665.96 1085,1042.5 1390,1347.5 R10.1
IRON_ISO: R11.1 U3.2 | length 1883.6
  Top Layer w10: v2(1445,1586.1) 1445,1640 1475,1670 v2(1680,1670) ; v2(2835,900) U3.2
  Bottom Layer w10: v2(1445,1586.1) R11.1 ; v2(1680,1670) 2310,1040 2695,1040 v2(2835,900)
L: J1.2 J6.1 R16.1 | length 337.4
  Top Layer w25: J6.1@445.16,1528.43 603.43,1528.43 670,1595 R16.1
N: J6.2 Q2.2 R19.1
NetC4_1: C4.1 C5.1 C6.1 D4.3 J3.2 Q4.3 R5.1 U3.6
NetC4_2: C4.2 C5.2 C6.2 R3.2 U3.8
NetC11_1: C11.1 D2.1 L1.1 U5.8
NetC11_2: C11.2 U5.1 | length 185.9
  Top Layer w25: C11.2 2770,1635 2796.43,1608.57 U5.1
NetD1_1: D1.1 R3.1 | length 139.6
  Top Layer w30: D1.1 2997.5,805.02 2997.5,672.5 R3.1
NetD3_1: D3.1 D3.2 J4.2 Q5.2
NetD5_1: D5.1 D5.2 J2.2 Q3.2
NetJ1_1: J1.1 Q1.2
NetJ5_3: J5.3 R10.2 | length 96.4
  Bottom Layer w10: R10.2 1390.87,1690.62 1429.88,1729.63 1429.88,1768.23 J5.3
NetJ5_5: J5.5 R11.2 | length 89.4
  Bottom Layer w10: R11.2 1449.64,1695.26 1449.64,1714.64 1470.47,1735.47 J5.5
NetJ5_7: J5.7 R12.2 | length 82.9
  Bottom Layer w10: R12.2 1500,1720 1509.84,1729.84 J5.7
NetJ5_9: J5.9 R13.2 | length 81.2
  Bottom Layer w10: J5.9 1549.21,1725.79 1555,1720 R13.2
NetJ5_11: J5.11 R14.2 | length 87.7
  Bottom Layer w10: J5.11 1588.58,1731.42 1610,1710 R14.2
NetQ3_1: Q3.1 R1.2 R2.2
NetQ4_1: Q4.1 R4.2 R5.2
NetQ5_1: Q5.1 R6.2 R7.2
NetR1_1: R1.1 U2.7 | length 637.9
  Top Layer w25: v2(1300,393.5) 1406.5,393.5 1442,429 1445.5,429 1453,436.5 R1.1 ; U2.7 v2(1305,800)
  Bottom Layer w25: v2(1300,393.5) 1305,398.5 v2(1305,800)
NetR6_1: R6.1 U4.7 | length 652.7
  Top Layer w25: U4.7 v1(2070,812.84) ; v1(2085,390) 2168,390 2207,429 2210.5,429 2218,436.5 R6.1
  Bottom Layer w25: v1(2070,812.84) 2070,405 v1(2085,390)
NetR8_1: R8.1 R9.2 U5.4 | length 119.7
  Top Layer w10: U5.4 2791.24,1429.81 R8.1 R9.2@2828.76,1355
NetR16_2: R16.2 R17.1 | length 75
  Top Layer w25: R16.2@790,1685 R17.1@865,1685
NetR17_2: R17.2 R18.1 | length 87.1
  Top Layer w25: R17.2@985,1685 990,1680 R18.1
NetR18_2: R18.2 U7.1 | length 86
  Top Layer w25: U7.1 1067.54,1557.54 R18.2
NetR19_2: R19.2 R20.1 | length 90
  Top Layer w25: R19.2 R20.1
NetR20_2: R20.2 R21.1 | length 92.1
  Top Layer w25: R20.2 940,1265 R21.1
NetR21_2: R21.2 U7.2 | length 106.1
  Top Layer w25: R21.2 1067.54,1272.54 U7.2
S_B: Q1.3 Q2.3 U1.3
VACCUM_PUMP_ISO: R13.1 U2.2 | length 887.9
  Top Layer w10: v2(1305,905) U2.2
  Bottom Layer w10: v2(1305,905) 1305,1000 1555,1250 R13.1
pads on no net: MH1.1 MH2.1 MH3.1 MH4.1 U2.3 U2.5 U3.3 U3.5 U4.3 U4.5 U5.2 U5.3 U5.5
copper on no net:
  other v2: 1030,155 2870,155 975,175 2815,175 1090,180 2930,180 950,235 1110,235 2790,235 2950,235 1090,290 2930,290 975,295 2815,295 1030,315 2870,315 430,1715 3470,1725 375,1735 490,1740 3415,1745 3530,1750 350,1795 510,1795 3390,1805 3550,1805 490,1850 375,1855 3530,1860 3415,1865 430,1875 3470,1885

## Polygon pours and split planes (outlines as drawn)
NetD3_1 on Top Layer "NETD3_1_L01_P011" (solid, pour order 11): 2220,990 2220,750 2280,690 2520,690 2580,630 2580,390 2550,360 2430,360 2400,330 2400,180 2430,150 2670,150 2700,180 2700,990 2640,1050 2280,1050
NetD5_1 on Top Layer "NETD5_1_L01_P022" (solid, pour order 22): 1920,150 1950,180 1950,435 1935,450 1935,990 1875,1050 1515,1050 1455,990 1455,750 1515,690 1755,690 1815,630 1815,390 1785,360 1649.01,360 1620,330.99 1620,182.01 1652.01,150
NetJ1_1 on Top Layer "NETJ1_1_L01_P029" (solid, pour order 29): 630,630 630,360 570,300 570,90 540,60 330,60 300,90 300,630 330,660 600,660
GND on Top Layer "NONET_L-01_P-001" (solid, pour order 51): 1840,1290 1840,1430 1770,1500 1625,1500 1610,1485 1610,1435 1595,1420 1395,1420 1380,1405 1380,1290 1395,1275 1825,1275
GND on Top Layer "NONET_L-01_P-001" (solid, pour order 45): 2595,1755 2625,1785 2690,1785 2705,1770 2705,1575 2690,1560 2355,1560 2310,1515 2310,1435 2295,1420 2038.71,1420 2040,1510 2140,1615 2140,1740 2155,1755
N on Top Layer "NONET_L-01_P-001" (solid, pour order 44): 585,1400 605,1420 665,1420 680,1405 680,1305 810,1175 810,925 795,910 541.22,910 525,926.22 525,1215 510,1230 330,1230 315,1245 315,1385 330,1400
5V0 on Top Layer "NONET_L-01_P-001" (solid, pour order 40): 2020,1510 2125,1615 2125,1920 2110,1935 2000,1935 1985,1920 1985,1705 1970,1690 1790,1690 1710,1610 1550,1610 1540,1610 1525,1595 1525,1525 1540,1510 1780,1510 1855,1435 1855,1280 1945,1280 1945,1435
GND on Top Layer "Top Layer-GND" (solid, pour order 39): 3315,1185 3315,1485 3300,1500 2950.98,1500 2935,1515.98 2935,1615 2955,1635 2955,1740.98 2940.98,1755 2839.84,1755 2825,1739.92 2825,1650 2844.93,1630.07 2844.93,1395.07 2860,1380 2860,1305 2845,1290 2580,1290 2565,1275 2565,1180 2575,1170 3300,1170
24V0 on Top Layer "Top Layer-24V0" (solid, pour order 38): 1170,30 1200.13,-0.13 3509.87,-0.13 ccw(c3509.87,120) 3630,120 3630,1020 3625,1025 3625,1680 3133.74,1680 3115,1661.26 3115,1636.31 3083.69,1605 3036.57,1557.89 2955,1557.89 2955,1515 3340,1515 3350,1505 3350,1100 3300,1050 3175,1050 3115,990 3115,750 3175,690 3420.4,690 3480.4,630 3480,629.6 3480,150 3450,120 2400,120 2370,150 2370,330 2340,360 2129.88,360 2099.88,330 2070,330 2040,360 2010,360 1980,330 1980,150 1950,120 1620,120 1590,150 1590,330 1560,360 1200,360 1170,330
15V0 on Top Layer "Top Layer-15V0" (solid, pour order 36): 2325,1410 2310,1395 2040,1395 2025,1410 1995,1410 1975,1410 1960,1395 1960,1275 1945,1260 1290,1260 1275,1245 1275,1100 1290.02,1084.98 1320.02,1084.98 1335,1070 1335,715 1320,700 1320,462.4 1332.4,450 1395,450 1425,480 1425,1070 1439.98,1084.98 2085.02,1084.98 2100,1070 2100,715 2085,700 2085,462.4 2097.4,450 2160,450 2190,480 2190,1070 2204.98,1084.98 2860.02,1084.98 2865,1080 2865,1005 2865,907.5 2872.5,900 3050,900 3060,910 3060,1145 3050,1155 2565,1155 2550,1170 2550,1290 2565,1305 2735,1305 2750,1320 2750,1385.01 2735,1400.01 2735,1530 2720,1545 2355,1545 2325,1515
NetC11_1 on Top Layer "NETC11_1_L01_P035" (solid, pour order 35): 3001.52,1572.78 3038.16,1572.78 3080.38,1615 3105,1639.62 3105,1676.26 3105,1920 3075,1950 2295,1950 2265,1920 2265,1800 2295,1770 2595,1770 2625,1800 2955,1800 2983.57,1771.43 2983.57,1650 2940.98,1607.41 2940.98,1572.78
NetQ4_1 on Top Layer "NETQ4_1_L01_P002" (solid, pour order 2): 3240,510 3270,480 3300,480 3318.34,461.66 3318.34,408.34 3300,390 3180,390 3150,420 3150,480 3120,510 3120,630 3150,660 3210,660 3240,630
NetC4_1 on Top Layer "NETC4_1_L01_P007" (solid, pour order 7): 3300,150 3270,180 3270,240 3240,270 3000,270 2970,300 2970,330 2954.97,345.03 2759.97,345.03 2730,375 2730,690 2760,720 2760,780 2820,780 2820,450 2850,420 3000,420 3060,360 3336.67,360 3336.67,503.33 3300,540 3300,630 3330,660 3420,660 3450,630 3450,180 3420,150
NetQ5_1 on Top Layer "NETQ5_1_L01_P008" (solid, pour order 8): 2340,515 2375,480 2405,480 2423.34,461.66 2423.34,408.34 2405,390 2285,390 2255,420 2255,480 2220,515 2220,625 2255,660 2315,660 2340,635
NetQ3_1 on Top Layer "NETQ3_1_L01_P009" (solid, pour order 9): 1580,510 1610,480 1640,480 1658.34,461.66 1658.34,408.34 1640,390 1520,390 1490,420 1490,480 1460,510 1460,630 1490,660 1550,660 1580,630
GND on Top Layer "GND_L01_P013" (solid, pour order 13): 2370,630.27 2370,540 2430,480 2430,420 2460,390 2520,390 2550,420 2550,630 2520,660 2399.73,660
GND on Top Layer "GND_L01_P016" (solid, pour order 16): 1995,725.09 1995.03,725.05 1985,715.02 1985,715 1960,715 1950,705 1950,685 1950,480 1980,450 2042.6,450 2055,462.4 2055,700 2040,715 2040,795 2035,800 2005,800 1995,790
NetC4_2 on Top Layer "NETC4_2_L01_P018" (solid, pour order 18): 2985,510 3030,510 3060,540 3060,570 3032.5,597.5 2987.5,597.5 2955,630 2955,735 2910,780 2870,780 2865,775 2865,710 2850,695 2850,480 2880,450 2945,450 2955,460 2955,480
GND on Top Layer "GND_L01_P019" (solid, pour order 19): 1605,630.27 1605,540 1665,480 1665,420 1695,390 1755,390 1785,420 1785,630 1755,660 1634.73,660
GND on Top Layer "GND_L01_P028" (solid, pour order 28): 1230,725.09 1230.03,725.05 1220,715.02 1220,715 1195,715 1185,705 1185,685 1185,480 1215,450 1277.6,450 1290,462.4 1290,700 1275,715 1275,795 1270,800 1240,800 1230,790
S_B on Top Layer "S_B_L01_P031" (solid, pour order 31): 810,645 795,660 760,660 745.33,674.67 745.33,765.33 760,780 855,780 870,795 870,830 855,845 495,845 480,860 480,980 465,995 315,995 300,980 300,720 330,690 630,690 679.09,640.91 679.09,571.56 710.66,540 780,540 810,570
NetC4_1 on Bottom Layer "NONET_L-01_P-001" (solid, pour order 1): 3330,660 3300,630 3300,540 3336.67,503.33 3336.67,326.67 3300,290 3300,170 3320,150 3420,150 3579.81,150 3600,170.19 3600,330 3600,645 3585,660
NetD3_1 on Bottom Layer "NONET_L-01_P-001" (solid, pour order 41): 2239.19,975 2239.19,700 2249.19,690 2499.19,690 2509.19,680 2509.19,606.5 2554.19,561.5 2554.19,475 2537.69,458.5 2516.69,458.5 2516.69,367.5 2429.19,280 2429.19,159.15 2438.34,150 2646.17,150 2659.19,163.02 2659.19,183.02 2659.19,980 2649.19,990 2254.19,990
NetD5_1 on Bottom Layer "NONET_L-01_P-001" (solid, pour order 43): 1475,975 1475,700 1485,690 1735,690 1745,680 1745,606.5 1790,561.5 1790,475 1773.5,458.5 1752.5,458.5 1752.5,367.5 1665,280 1665,159.15 1674.15,150 1881.98,150 1895,163.02 1895,183.02 1895,980 1885,990 1490,990
24V0 on Bottom Layer "NONET_L-01_P-001" (solid, pour order 46): 2129.19,639.72 2129.19,635 2129.19,160 2139.19,150 2344.19,150 2354.19,160 2354.19,375.5 2379.19,400.5 2379.19,640.07 2369.26,650 2139.47,650
24V0 on Bottom Layer "NONET_L-01_P-001" (solid, pour order 47): 1365,639.72 1365,635 1365,160 1375,150 1580,150 1590,160 1590,375.5 1615,400.5 1615,640.07 1605.07,650 1375.28,650
GND on Bottom Layer "NONET_L-01_P-001" (solid, pour order 50): 1255,1944.98 1255,1780 1347.5,1687.5 1347.5,1347.5 1035,1035 1035,435 925,325 925,5 930,0 3530.13,0 ccw(c3530.13,104.87) 3635,104.87 3635,1840.27 ccw(c3520.76,1840.27) 3520.27,1954.52
L on Bottom Layer "NONET_L-01_P-001" (solid, pour order 49): 910,395 850,335 850,75 825,50 625,50 615,60 615,1435 600,1450 335,1450 320,1465 320,1615 335,1630 895,1630 910,1615

## Silkscreen, mask and mechanical layers (free items; w line width, h text height)
Top Overlay:
  text "Soldering Station" at 740,1854.99 h60
  text "Power Board" at 1049.9,1740 h60
  text "V0.1" at 1255,1619.5 h60
  text "AC IN" at 660,1515 h60
  text "DC IN" at 3535,915 h60 r90
  text "Iron" at 3035,152.47 h30 r90
  text "Blower" at 2140,124.97 h30 r90
  text "Vaccum Pump" at 1370,45 h30 r90
Mechanical 1:
  the board outline again, w10

## Text inside footprints (layer, text, board x,y; h text height)
D3: Mechanical 13 "*" at 2462.5,617.5 h50 r90
D4: Mechanical 13 "*" at 3257.5,412.5 h50 r270
D5: Mechanical 13 "*" at 1697.5,622.5 h50 r90
U2: Mechanical 13 "*" at 1328,934.5 h50 r270
U3: Mechanical 13 "*" at 2858,934.5 h50 r270
U4: Mechanical 13 "*" at 2093,934.5 h50 r270